# Altium PCB lightswitch_controller.PcbDoc
Units mil, origin at the board's own origin, x right, y up, seen from the top; angles counter-clockwise.
Board outline 6000 x 4000 mil, 2 copper layers (Top Layer, Bottom Layer); 22 components, 18 nets, 103 pads, 12 vias.
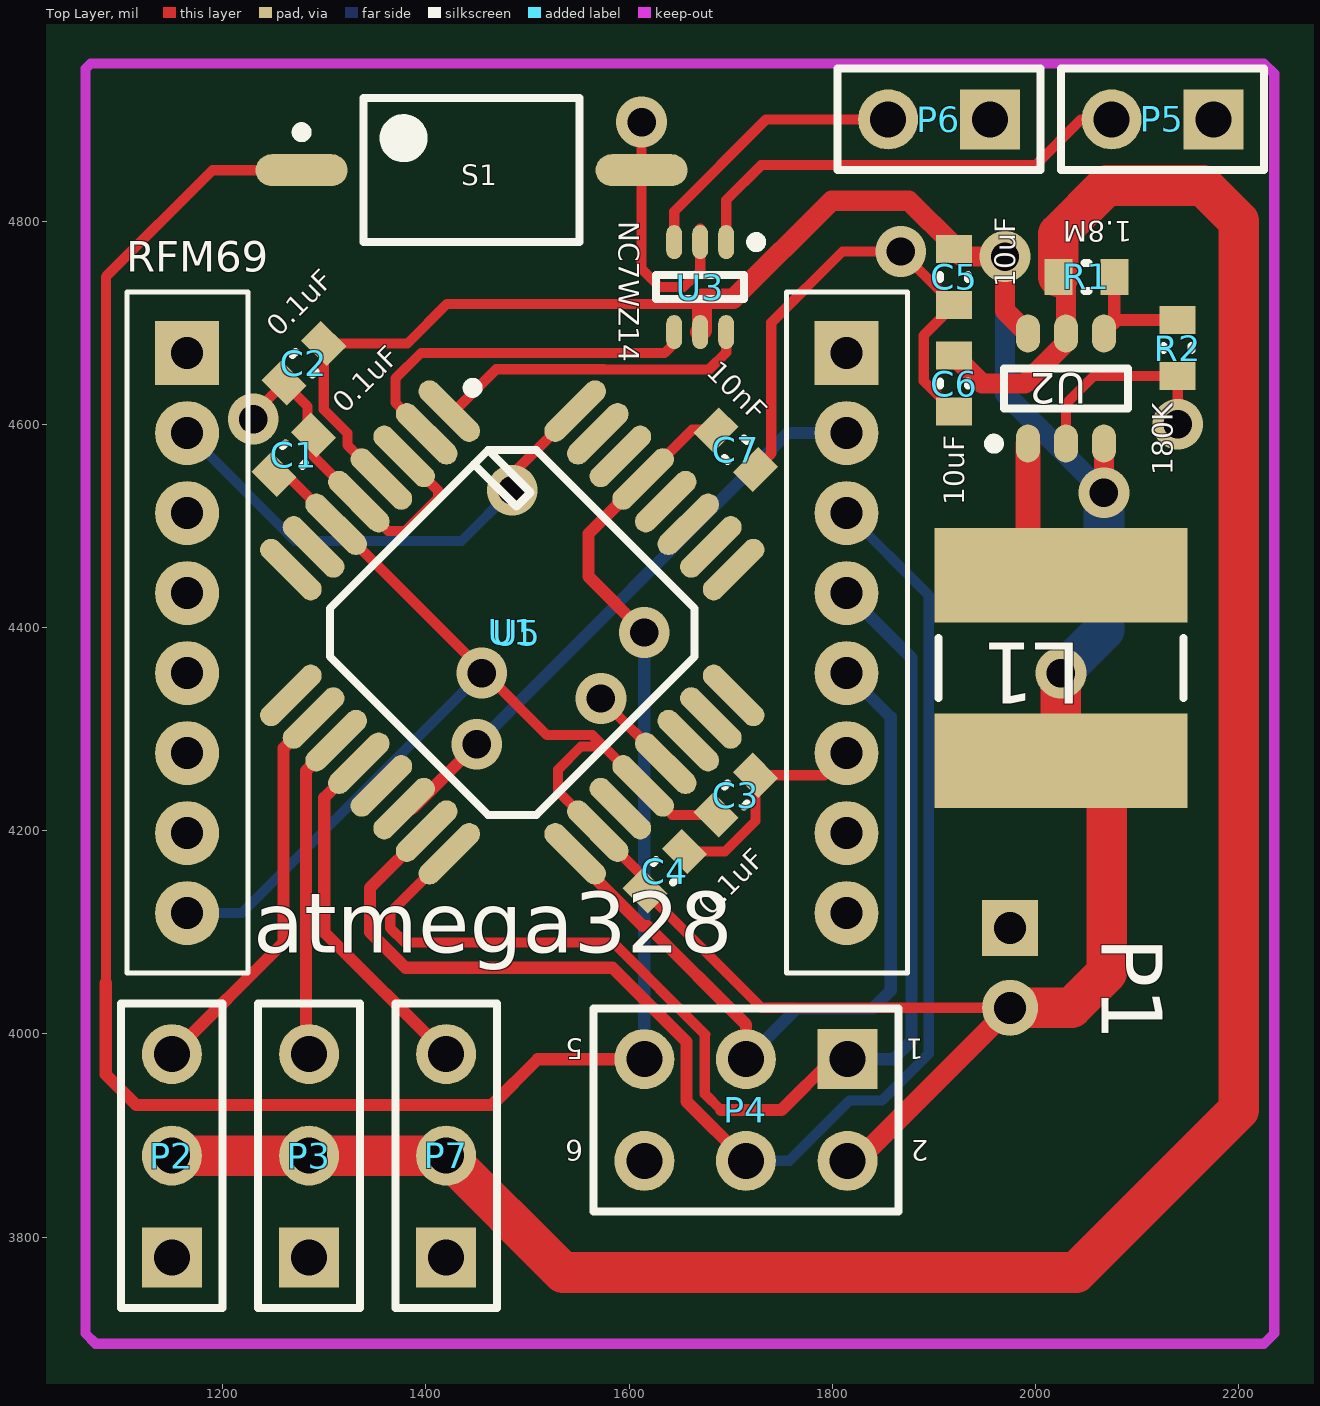
[diagram p0: Top Layer view]
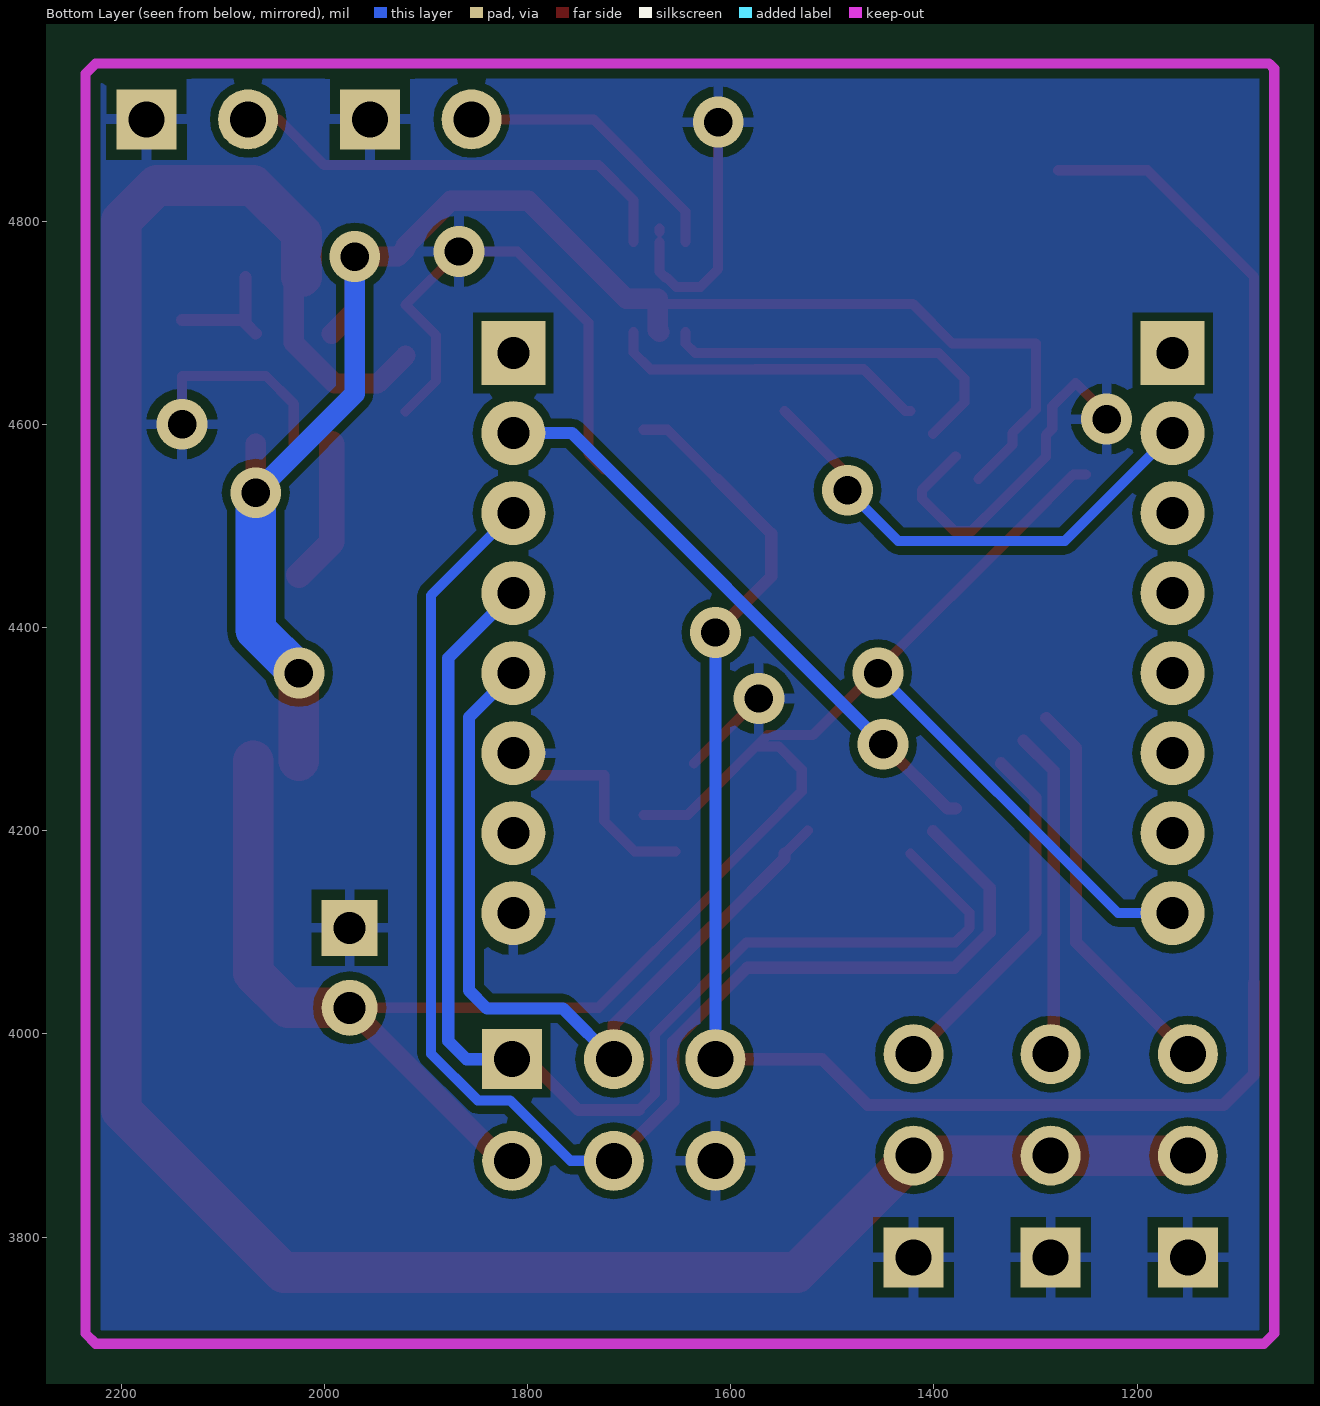
[diagram p1: Bottom Layer view, seen from below]

## Layer stack, top to bottom
Top Solder: solder mask 0.4, Solder Resist, Dk 3.5
Top Layer: signal copper 1.4
Dielectric 1: dielectric 12.6, FR-4, Dk 4.8
Bottom Layer: signal copper 1.4
Bottom Solder: solder mask 0.4, Solder Resist, Dk 3.5

## Board outline
1000,1000 7000,1000 7000,5000 1000,5000

## Design rules (kind name [scope] priority, off if disabled: settings)
Clearance Clearance_Pour [InNamedPolygon('BottomLayer-GND')] p1: gap=8
Clearance [All] p2: gap=6
HoleSize [All] p1: absolutevalues=TRUE maxlimit=100 minlimit=12 maxpercent=80.000 minpercent=20.000
PolygonConnect [All] p1: connectstyle=Relief reliefconductorwidth=10 reliefentries=4 polygonreliefangle="90 Angle" airgapwidth=10
RoutingVias [All] p1: holewidth=15 width=35 viastyle="Through Hole" minholewidth=15 minwidth=35 maxholewidth=80 maxwidth=100
SolderMaskExpansion [All] p1: expansion=4
UnpouredPolygon [All] p1: allowunpoured=FALSE
Width [All] p1: maxlimit=100 minlimit=10 preferedwidth=12
28 further rules are at their usual default settings.

## Components (designator, comment, footprint, x,y, rotation, side; value= is the part's Value field where it differs from the comment)
C1 "0.1uF" CAPC0603(1608)100_L 1270,4570 r225 top
C2 "0.1uF" CAPC0603(1608)100_L 1280,4660 r45 top
C3 "0.1uF" CAPC0603(1608)100_L 1705,4235 r225 top
C4 "CAP 100nF 10V 0603(1608)" CAPC0603(1608)100_L 1635,4160 r225 top
C5 "10uF" CAPC0603(1608)100_L 1920,4745 r90 top
C6 "10uF" CAPC0603(1608)100_L 1920,4640 r90 top
C7 "10nF" CAPC0603(1608)100_L 1705,4575 r135 top
L1 "TYS6045_inductor" TYS6045 2025,4360 r90 top
P1 "Hirose2" DF3A-2P-2DS 1975,4065 r270 top
P2 "Header 3" HDR1X3 1150,3780 r90 top
P3 "Header 3" HDR1X3 1285,3780 r90 top
P4 "Header 3X2" HDR2X3 1815,3975 r180 top
P5 "Header 2" HDR1X2 2175,4900 r180 top
P6 "Header 2" HDR1X2 1955,4900 r180 top
P7 "Header 3" HDR1X3 1420,3780 r90 top
R1 "1.8M" RESC0603(1608)_L 2050,4745 r180 top
R2 "180K" RESC0603(1608)_L 2140,4675 r90 top
S1 "2lead_low_profile_switch" 2lead_low_profile_switch 1445,4850 r0 top
U1 "atmega328" atmega44/88/168 1485,4395 r315 top
U2 "tlv61220_boost" TLV61220_BOOST 2030,4635 r90 top
U3 "NC7WZ14" NC7WZ14 1670,4735 r270 top
U5 "RFM69" RFM69 1165,4395 r0 top

## Footprints (in the part's own frame and the unit in brackets; to place one, negate y for a bottom-side part, rotate by r counter-clockwise, add the part's x,y. Pads: shape width x height; smd on the part's side, far side on the other; paste and mask are expansions set on the pad)
2lead_low_profile_switch [mm] "CFP, 2-Leads, Body 3.60x6.00mm (max), Pitch 0.00mm, IPC Medium Density"
  oval 2.3x0.8 smd: 1(-4.25,0) 2(4.25,0)
  silkscreen extent -4.37,-1.8 2.7,1.8, body extent -3,-1.8 3,1.8, height 2.5
atmega44/88/168 [mm] "CQFP, 32-Leads, Body 11.15x11.15mm, Pitch 0.80mm, IPC Medium Density"
  oval 1.95x0.55 smd: 1(-5.025,2.8) 2(-5.025,2) 3(-5.025,1.2) 4(-5.025,0.4) 5(-5.025,-0.4) 6(-5.025,-1.2) 7(-5.025,-2) 8(-5.025,-2.8) 17(5.025,-2.8) 18(5.025,-2) 19(5.025,-1.2) 20(5.025,-0.4) 21(5.025,0.4) 22(5.025,1.2) 23(5.025,2) 24(5.025,2.8)
  oval 0.55x1.95 smd: 9(-2.8,-5.025) 10(-2,-5.025) 11(-1.2,-5.025) 12(-0.4,-5.025) 13(0.4,-5.025) 14(1.2,-5.025) 15(2,-5.025) 16(2.8,-5.025) 25(2.8,5.025) 26(2,5.025) 27(1.2,5.025) 28(0.4,5.025) 29(-0.4,5.025) 30(-1.2,5.025) 31(-2,5.025) 32(-2.8,5.025)
  silkscreen extent -5.15,-3.65 3.65,3.75, body extent -3.5,-3.5 3.5,3.5, height 1.2
CAPC0603(1608)100_L [mm] "Chip Capacitor, Body 1.6x0.8mm, Height 1.0mm, IPC High Density"
  rect 0.7x0.9 smd: 1(-0.7,0) 2(0.7,0)
  silkscreen extent -0.05,-0.35 0.05,0.35, body extent -0.88,-0.47 0.88,0.48, height 1
DF3A-2P-2DS [mm] "Two terminal, Right Angle Connector"
  rect 1.4x1.4 hole 0.8: 1(-1,0)
  round 1.4 hole 0.8: 2(1,0)
  body extent -3.05,-1.5 3.05,5.7, height 5
HDR1X2 [mm] "Connector; Header; 2 Position"
  rect 1.5x1.5 hole 0.9: 1(0,0)
  round 1.5 hole 0.9: 2(2.54,0)
  silkscreen extent -1.27,-1.27 3.81,1.27
HDR1X3 [mm] "Connector; Header; 3 Position"
  rect 1.5x1.5 hole 0.9: 1(0,0)
  round 1.5 hole 0.9: 2(2.54,0) 3(5.08,0)
  silkscreen extent -1.27,-1.27 6.35,1.27
HDR2X3 [mm] "Connector; Header; 3x2 Position"
  rect 1.5x1.5 hole 0.9: 1(0,0)
  round 1.5 hole 0.9: 2(0,2.54) 3(2.54,0) 4(2.54,2.54) 5(5.08,0) 6(5.08,2.54)
  silkscreen extent -1.27,-1.27 6.35,3.81
NC7WZ14 [mm] "TinyLogic Dual Inverter with Schmitt trigger inputs, IPC Compliant"
  oval 0.85x0.4 smd: 1(-1.125,0.65) 2(-1.125,0) 3(-1.125,-0.65) 4(1.125,-0.65) 5(1.125,0) 6(1.125,0.65)
  silkscreen extent -1.25,-1.1 0.3,1.53, body extent -0.7,-1.1 0.7,1.1, height 1
RESC0603(1608)_L [mm] "Chip Resistor, Body 1.6x0.8mm, IPC High Density"
  rect 0.7x0.9 smd: 1(-0.7,0) 2(0.7,0)
  silkscreen extent -0.05,-0.35 0.05,0.35, body extent -0.85,-0.47 0.85,0.47, height 0.6
RFM69 [mm]
  rect 1.6x1.6 hole 0.8: 1(0,6.985) 16(16.485,6.985)
  round 1.6 hole 0.8: 2(0,4.985) 3(0,2.985) 4(0,0.985) 5(0,-1.015) 6(0,-3.015) 7(0,-5.015) 8(0,-7.015) 9(16.485,-7.015) 10(16.485,-5.015) 11(16.485,-3.015) 12(16.485,-1.015) 13(16.485,0.985) 14(16.485,2.985) 15(16.485,4.985)
  silkscreen extent -1.5,-8.51 18.01,8.51, body extent -1.68,-8.76 18.16,8.71, height 9.8
TLV61220_BOOST [mm] "TSOP, 6-Leads, Body 2.90x1.60mm, Pitch 0.95mm, IPC Medium Density"
  oval 0.95x0.6 smd: 1(-1.375,0.95) 2(-1.375,0) 3(-1.375,-0.95) 4(1.375,-0.95) 5(1.375,0) 6(1.375,0.95)
  silkscreen extent -1.5,-1.55 0.5,1.92, body extent -0.9,-1.55 0.9,1.55, height 1.45
TYS6045 [mm] "Chip Inductor, 2-Leads, Body 6.00x6.00mm, IPC Medium Density"
  rect 2.36x6.32 smd: 1(-2.32,0) 2(2.32,0)
  silkscreen extent -0.75,-3.06 0.75,3.06, body extent -3.15,-3.15 3.15,3.15, height 4.5

## Part data
C1 C2 C3 C4: library part CMP-1035-02581-1, "CAP 100nF 10V ±20% 0603 (1608 Metric) Thickness 1mm SMD"
C5 C6: library part CMP-1035-02799-1, "CAP 10uF 10V ±10% 0603 (1608 Metric) Thickness 1mm SMD"
C7: library part CMP-1035-02304-1, "CAP 10nF 10V ±2% 0603 (1608 Metric) Thickness 1mm SMD"
P2 P3 P7: "Header, 3-Pin"
P4: "Header, 3-Pin, Dual row"
P5 P6: "Header, 2-Pin"
R1: library part CMP-1012-00152-1, "1M8 0.1W 5% 0603 (1608 Metric)  SMD"
R2: library part CMP-1012-00128-1, "180K 0.1W 5% 0603 (1608 Metric)  SMD"
U1: library part atmega88

## Via types
v1: diameter 50, hole 28, Top Layer to Bottom Layer, 12 vias

## Nets (pads, with @x,y where several pads share a name; then routed paths per layer and width w, separated by ;. In a path a pad name is that pad's centre, name@x,y a point inside that pad or via, vN(x,y) a via of type N, cw(c..) or ccw(c..) an arc to the next point about the centre after c; other vN are vias at no path point)
3.7V: C1.2 C2.2 C3.2 C4.2 C5.2 L1.1 P1.2 P4.2 U1.4 U1.6 U1.18 U1.20 U2.3 U2.6 U3.5 U5.8 | length 3752.8
  Top Layer w10: C1.2 1262.67,4550.51 U1.6 v1@1455,4358.19 ; U1.4 1322.76,4579.51 1322.76,4591.26 1299.49,4614.53 C2.2 1381.86,4679.49 1420.81,4718.44 1666.72,4718.44 1671.72,4723.44 ; v1(1455,4355) v1@1455,4358.19 ; C3.2 1642.22,4215.51 U1.20 1575,4282.73 ; P1.2 1730.4,4025.63 C4.2 1615.51,4153.13 U1.18 1530,4238.64 1530,4260 1552.73,4282.73 1575,4282.73 ; v1@1455,4358.19 1519.19,4294 1563.73,4294 1575,4282.73
  Top Layer w20: U3.5 1671.72,4692.43 1671.72,4723.44 1702.73,4723.44 1799.29,4820 1875.42,4820 1920,4775.42 C5.2 1927.56,4765 v1(1970,4765) 1970,4711.73 U2.6 ; P4.2 1824.37,3875 P1.2 ; v1(2067.4,4532.6) U2.3
  Top Layer w40: P1.2 2035.63,4025.63 2070,4060 L1.1@2070,4268.66 ; L1.1 v1(2025,4355)
  Bottom Layer w10: U5.8 1218.82,4118.82 v1(1455,4355)
  Bottom Layer w20: v1(1970,4765) 1970,4630 v1(2067.4,4532.6)
  Bottom Layer w40: v1(2025,4355) 2067.4,4397.4 v1(2067.4,4532.6)
5.5V: C6.2 P2.2 P3.2 P7.2 R1.2 U2.5 | length 2499
  Top Layer w20: C6.2 1947.56,4640 1989.68,4640 2030,4680.31 U2.5 2030,4737.44 R1.2
  Top Layer w40: P2.2 P3.2 P7.2 1535,3765 2040,3765 2200,3925 2200,4800 2165,4835 2070,4835 2022.44,4787.44 R1.2
BUTTON1: P5.2 U3.1 | length 453.6
  Top Layer w10: U3.1 1695.59,4820.59 1730,4855 2000,4855 2045,4900 P5.2
BUTTON2: P6.2 U3.3 | length 278.2
  Top Layer w10: U3.3 1644.41,4809.41 1735,4900 P6.2
BUTTON_OUT1: U1.1 U3.6 | length 316.7
  Top Layer w10: U1.1 1427.84,4612.84 1469.15,4654.15 1575.47,4654.15 1575.62,4654 1679,4654 1695.59,4670.59 U3.6
BUTTON_OUT2: U1.2 U3.4 | length 367.3
  Top Layer w10: U1.2 1370,4621.36 1370,4645 1395.15,4670.15 1582.1,4670.15 1582.25,4670 1635,4670 1644.41,4679.41 U3.4
GND: C1.1 C2.1 C3.1 C4.1 C5.1 C6.1 C7.1 P1.1 P2.1 P3.1 P4.6 P5.1 P6.1 P7.1 R2.1 S1.2 U1.3 U1.5 U1.21 U2.2 U3.2 U5.9 U5.11 | length 1637.4
  Top Layer w10: v1(1230,4605) 1230,4610 C2.1 1283.49,4617.54 1283.49,4595.49 C1.1 1289.49,4568.24 U1.5 1362.73,4495 1380,4495 1411.81,4526.81 1411.81,4535 U1.3 ; v1(1572.27,4330) U1.21 ; v1(1612.32,4897.32) S1.2 1612.32,4752.68 1630,4735 1653.58,4735 1663.02,4744.44 1664.44,4744.44 1670,4750 U3.2 ; C4.1 1694.49,4179.49 1724.49,4209.49 C3.1 1792.19,4254.49 U5.11 ; U3.2@1670,4789.25 U3.2@1670,4792.32 ; C7.1 1740,4571.03 1740,4700 1810,4770 v1(1867.44,4770) C5.1 1890,4687.44 1890,4642.44 C6.1 ; U2.2 2030,4620 2057.44,4647.44 R2.1 v1(2140,4600)
MISO: P4.1 U1.16 U5.13 | length 1214.6
  Top Layer w10: U1.16 1365,4119.1 1365,4104.04 1379.04,4090 1584.18,4090 1675,3999.18 1674.47,3998.66 1674.47,3940.98 1690.46,3925
  Top Layer w12: 1690.46,3925 1750,3925 1800,3975 P4.1
  Bottom Layer w12: U5.13 1878,4369.78 1878,3993 1860,3975 P4.1
MOSI: P4.4 U1.15 U5.14 | length 1409.5
  Top Layer w12: U1.15 1345,4143.64 1345,4100 1380,4065 1583.73,4065 1656.53,3992.2 1656.53,3933.47 P4.4
  Bottom Layer w10: P4.4 1757.69,3875 1817.16,3934.47 1849.08,3934.47 1895,3980.39 1895,4431.52 U5.14
NetL1_2: L1.2 U2.1 | length 142.9
  Top Layer w25: U2.1 1992.6,4483.74 L1.2
NetR1_1: R1.1 R2.2 U2.4 | length 123.9
  Top Layer w12: U2.4 U2.4@2077.56,4699.29 ; R1.1 U2.4@2077.56,4699.29 ; R2.2 2080.83,4702.56 U2.4@2077.56,4699.29
RESET: C7.2 P4.5 S1.1 U1.29 | length 2290.1
  Top Layer w10: 1085,4050 1085,4745 1190,4850 S1.1 ; U1.29 1662.22,4594.49 C7.2
  Top Layer w12: 1085,4050 1085,3960 1115,3930 1465,3930 1510,3975 P4.5 ; U1.29 1560,4492.27 1560,4450 v1(1615,4395)
  Bottom Layer w12: P4.5 v1(1615,4395)
RFM_INTERRUPT: U1.32 U5.2 | length 488.2
  Top Layer w10: v1(1485,4535) 1485,4550.9 U1.32
  Bottom Layer w10: U5.2 1271.26,4485 1435,4485 v1(1485,4535)
SCK: P4.3 U1.17 U5.12 | length 807.7
  Top Layer w10: U1.17@1524.1,4200 U1.17
  Top Layer w12: U1.17 1546.94,4172.63 1613.33,4106.24 1617.86,4106.24 1715,4009.1 P4.3
  Bottom Layer w12: P4.3 1765,4025 1839.99,4025 1857.5,4042.5 1857.5,4311.54 U5.12
SERVO1: P2.3 U1.10 | length 388.5
  Top Layer w12: P2.3 1260,4090 1260,4281.36 U1.10
SERVO2: P3.3 U1.11 | length 322.1
  Top Layer w12: P3.3 1282,3983 1282,4258.81 U1.11
SERVO3: P7.3 U1.12 | length 350
  Top Layer w12: U1.12 1300,4232.27 1300,4100 P7.3
SS: U1.14 U5.15 | length 588.6
  Top Layer w12: U1.14 1386.7,4221.7 v1(1450,4285)
  Bottom Layer w12: v1(1450,4285) 1756.26,4591.26 U5.15
pads on no net: U1.7 U1.8 U1.9 U1.13 U1.19 U1.22 U1.23 U1.24 U1.25 U1.26 U1.27 U1.28 U1.30 U1.31 U5.1 U5.3 U5.4 U5.5 U5.6 U5.7 U5.10 U5.16

## Polygon pours and split planes (outlines as drawn)
GND on Bottom Layer "BottomLayer-GND" (solid, remove dead copper, pour order 2): 1080,4940 2220,4940 2220,3705 2225,3700 1080,3700

## Keep-outs
Keep-Out Layer:
  lines w10: 1065,3705 1065,4950 1070,4955 2225,4955 2235,4945 2235,3705 2225,3695 1075,3695 1065,3705

## Text inside footprints (layer, text, board x,y; h text height)
P4: Top Overlay "1" at 1890,3995 h20 r180; Top Overlay "2" at 1895,3895 h20 r180; Top Overlay "5" at 1555,3995 h20 r180; Top Overlay "6" at 1555,3895 h20 r180